# Altium PCB PCB_3U_DAC.PCBDOC
Units mm, origin at the board's own origin, x right, y up, seen from the top; angles counter-clockwise.
Board outline 58 x 105 mm, 4 copper layers (TopLayer, MidLayer2, MidLayer8, BottomLayer), stack 1.662 mm thick; 29 components, 0 nets, 158 pads, 0 vias.
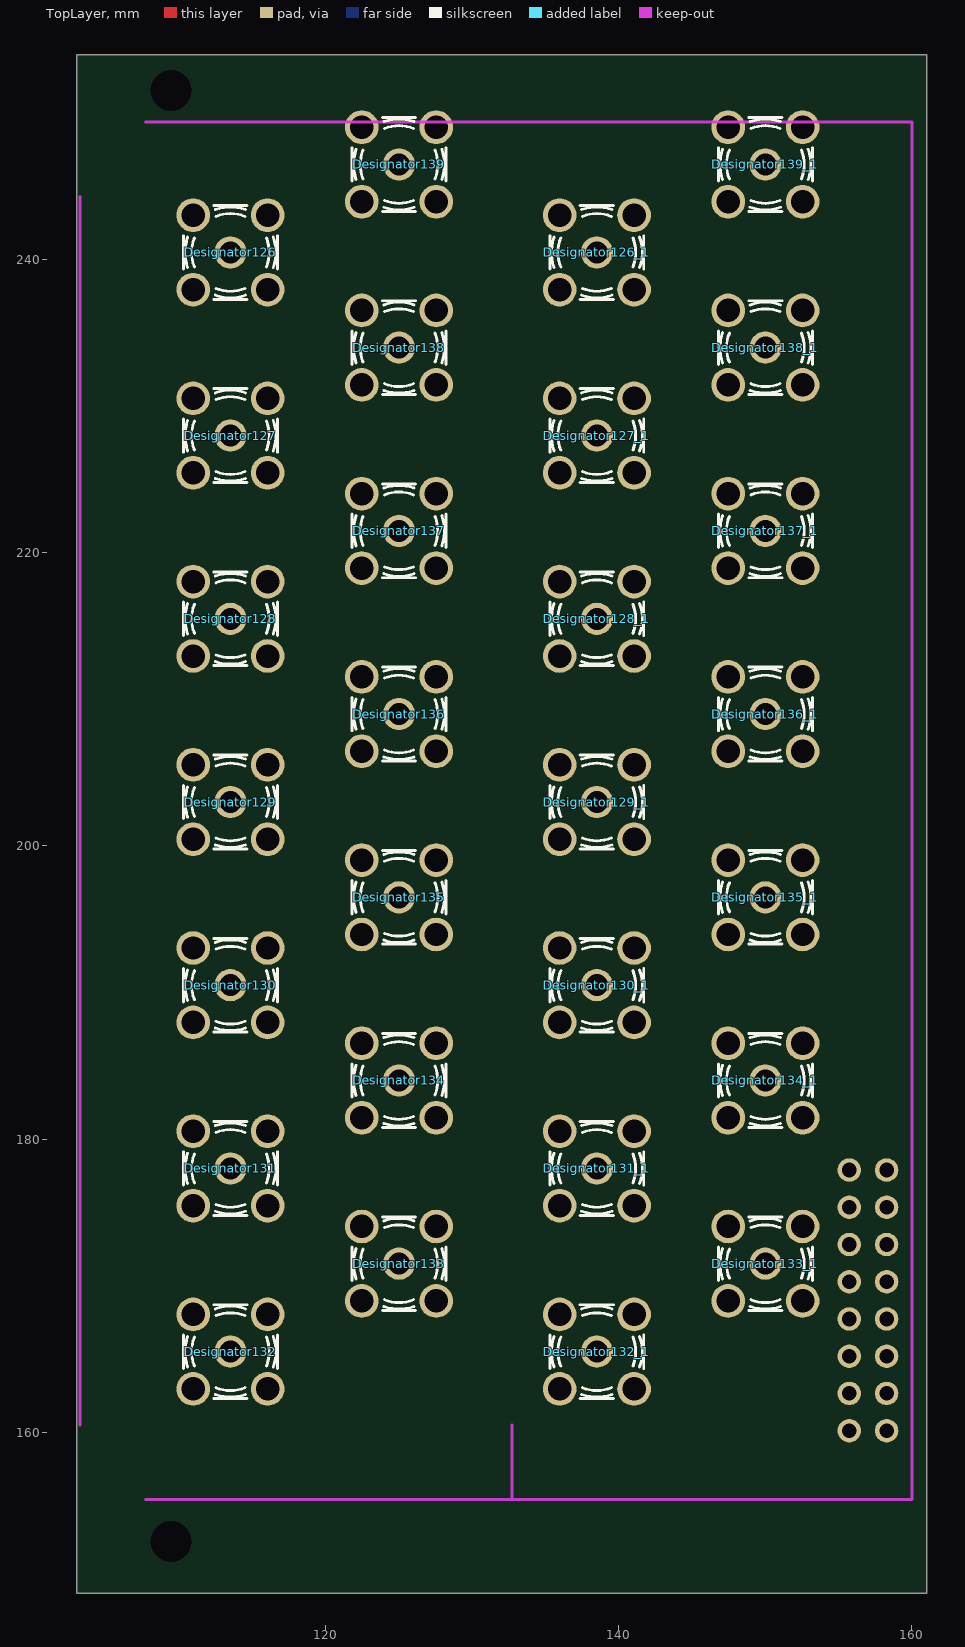
[diagram p0: TopLayer view]
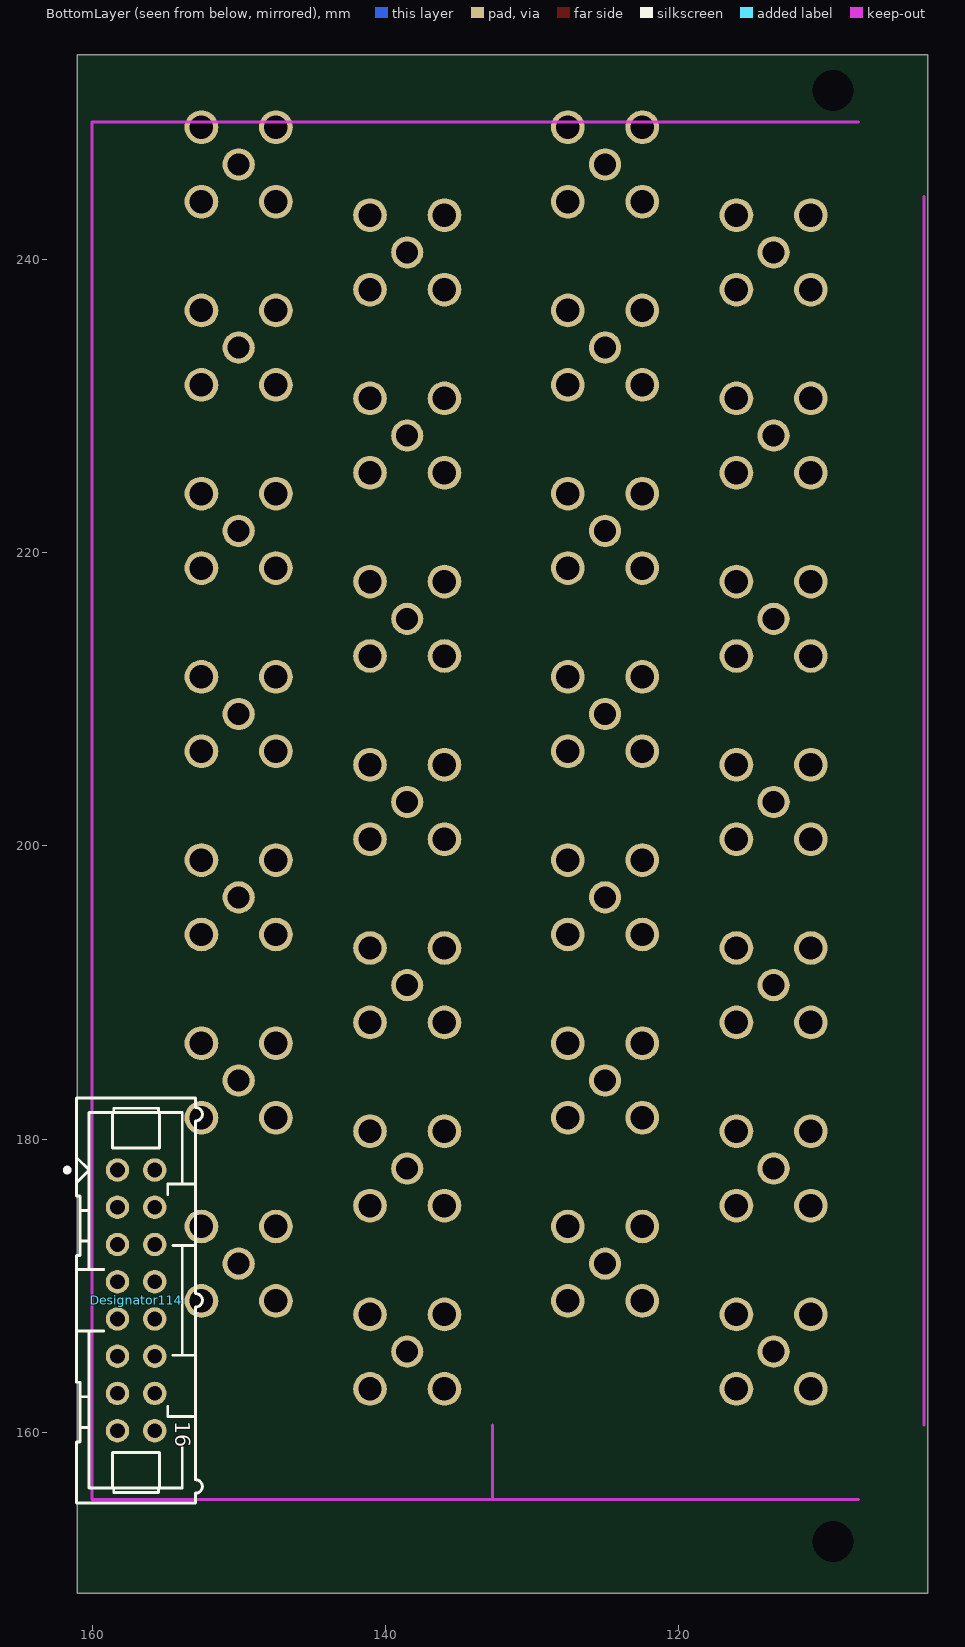
[diagram p1: BottomLayer view, seen from below]

## Layer stack, top to bottom
TopLayer: signal copper 0.0356
Dielectric: core 0.6, FR-4, Dk 4.8
MidLayer2: signal copper 0.0356
Dielectric: prepreg 0.6, FR-4, Dk 4.8
MidLayer8: signal copper 0.0356
Dielectric: core 0.32, FR-4, Dk 4.8
BottomLayer: signal copper 0.0356

## Board outline
103,149 161,149 161,254 103,254

## Design rules (kind name [scope] priority, off if disabled: settings)
Clearance [All] p1: gap=0.254
FabricationTestPointUsage TestPointUsage [All] p1: valid=0 allowmultiple=FALSE
FabricationTestpoint Testpoint [All] p1: side=3 testpointundercomponent=TRUE minsize=1.016 maxsize=2.54 preferedsize=1.524 minholesize=0.508 maxholesize=1.016 preferedholesize=0.813 testpointgrid=0.025 allowsidetop=TRUE allowsidebottom=TRUE usegrid=TRUE gridtolerance=0
PlaneClearance [All] p1: clearance=0.254
PolygonConnect [All] p1: connectstyle=Relief reliefconductorwidth=0.254 reliefentries=4 polygonreliefangle="90 Angle" airgapwidth=0.254
RoutingVias [All] p1: holewidth=0.711 width=1.27 viastyle="Through Hole" minholewidth=0.711 minwidth=1.27 maxholewidth=0.711 maxwidth=1.27
SilkscreenOverComponentPads [IsPad] p1: minsilkscreentomaskgap=0.254
SolderMaskExpansion [All] p1: expansion=0.051
Width [All] p1: maxlimit=0.254 minlimit=0.254 preferedwidth=0.254
24 further rules are at their usual default settings.

## Components (designator, comment, footprint, x,y, rotation, side; value= is the part's Value field where it differs from the comment)
Designator114 "Comment" 3M_N2516-6002RB 157,169 r270 bottom
Designator126 "Comment" HUBER-SUHNER_82_SMA-50-0-41/133_NE 113.5,240.5 r0 top
Designator126_1 "Comment" HUBER-SUHNER_82_SMA-50-0-41/133_NE 138.5,240.5 r0 top
Designator127 "Comment" HUBER-SUHNER_82_SMA-50-0-41/133_NE 113.5,228 r0 top
Designator127_1 "Comment" HUBER-SUHNER_82_SMA-50-0-41/133_NE 138.5,228 r0 top
Designator128 "Comment" HUBER-SUHNER_82_SMA-50-0-41/133_NE 113.5,215.5 r0 top
Designator128_1 "Comment" HUBER-SUHNER_82_SMA-50-0-41/133_NE 138.5,215.5 r0 top
Designator129 "Comment" HUBER-SUHNER_82_SMA-50-0-41/133_NE 113.5,203 r0 top
Designator129_1 "Comment" HUBER-SUHNER_82_SMA-50-0-41/133_NE 138.5,203 r0 top
Designator130 "Comment" HUBER-SUHNER_82_SMA-50-0-41/133_NE 113.5,190.5 r0 top
Designator130_1 "Comment" HUBER-SUHNER_82_SMA-50-0-41/133_NE 138.5,190.5 r0 top
Designator131 "Comment" HUBER-SUHNER_82_SMA-50-0-41/133_NE 113.5,178 r0 top
Designator131_1 "Comment" HUBER-SUHNER_82_SMA-50-0-41/133_NE 138.5,178 r0 top
Designator132 "Comment" HUBER-SUHNER_82_SMA-50-0-41/133_NE 113.5,165.5 r0 top
Designator132_1 "Comment" HUBER-SUHNER_82_SMA-50-0-41/133_NE 138.5,165.5 r0 top
Designator133 "Comment" HUBER-SUHNER_82_SMA-50-0-41/133_NE 125,171.5 r0 top
Designator133_1 "Comment" HUBER-SUHNER_82_SMA-50-0-41/133_NE 150,171.5 r0 top
Designator134 "Comment" HUBER-SUHNER_82_SMA-50-0-41/133_NE 125,184 r0 top
Designator134_1 "Comment" HUBER-SUHNER_82_SMA-50-0-41/133_NE 150,184 r0 top
Designator135 "Comment" HUBER-SUHNER_82_SMA-50-0-41/133_NE 125,196.5 r0 top
Designator135_1 "Comment" HUBER-SUHNER_82_SMA-50-0-41/133_NE 150,196.5 r0 top
Designator136 "Comment" HUBER-SUHNER_82_SMA-50-0-41/133_NE 125,209 r0 top
Designator136_1 "Comment" HUBER-SUHNER_82_SMA-50-0-41/133_NE 150,209 r0 top
Designator137 "Comment" HUBER-SUHNER_82_SMA-50-0-41/133_NE 125,221.5 r0 top
Designator137_1 "Comment" HUBER-SUHNER_82_SMA-50-0-41/133_NE 150,221.5 r0 top
Designator138 "Comment" HUBER-SUHNER_82_SMA-50-0-41/133_NE 125,234 r0 top
Designator138_1 "Comment" HUBER-SUHNER_82_SMA-50-0-41/133_NE 150,234 r0 top
Designator139 "Comment" HUBER-SUHNER_82_SMA-50-0-41/133_NE 125,246.5 r0 top
Designator139_1 "Comment" HUBER-SUHNER_82_SMA-50-0-41/133_NE 150,246.5 r0 top

## Footprints (in the part's own frame and the unit in brackets; to place one, negate y for a bottom-side part, rotate by r counter-clockwise, add the part's x,y. Pads: shape width x height; smd on the part's side, far side on the other; paste and mask are expansions set on the pad)
3M_N2516-6002RB [mm] "16 Contacts - Straight .100\" x .100\" Low Profile Four-Wall Header"
  round 1.6 hole 1: 1(-8.89,-1.27) 2(-8.89,1.27) 3(-6.35,-1.27) 4(-6.35,1.27) 5(-3.81,-1.27) 6(-3.81,1.27) 7(-1.27,-1.27) 8(-1.27,1.27) 9(1.27,-1.27) 10(1.27,1.27) 11(3.81,-1.27) 12(3.81,1.27) 13(6.35,-1.27) 14(6.35,1.27) 15(8.89,-1.27) 16(8.89,1.27)
  silkscreen extent -13.82,-4.85 13.82,4.52, body extent -13.82,-4.17 13.82,4.52, height 9.65
HUBER-SUHNER_82_SMA-50-0-41/133_NE [mm] "50 Ohm SMA Straight PCB Jack"
  round 2.2 hole 1.5: 1(0,0)
  round 2.3 hole 1.6: 2(-2.54,-2.54) 2(-2.54,2.54) 2(2.54,-2.54) 2(2.54,2.54)
  silkscreen extent -3.2,-3.2 3.2,3.2, body extent -3.2,-3.2 3.2,3.2, height 9.5

## Part data
Designator114 Designator126 Designator126_1 Designator127 Designator127_1 Designator128 Designator128_1 Designator129 Designator129_1 Designator130 Designator130_1 Designator131 Designator131_1 Designator132 Designator132_1 Designator133 Designator133_1 Designator134 Designator134_1 Designator135 Designator135_1 Designator136 Designator136_1 Designator137 Designator137_1 Designator138 Designator138_1 Designator139 Designator139_1: library part "HARTING_16 25 170 1301 000"

## Free pads (board coordinates)
  round 1.27 hole 2.794: 1(109.458,251.557) 2(109.458,152.557)

## Nets (pads, with @x,y where several pads share a name; then routed paths per layer and width w, separated by ;. In a path a pad name is that pad's centre, name@x,y a point inside that pad or via, vN(x,y) a via of type N, cw(c..) or ccw(c..) an arc to the next point about the centre after c; other vN are vias at no path point)
pads on no net: Designator114.1 Designator114.2 Designator114.3 Designator114.4 Designator114.5 Designator114.6 Designator114.7 Designator114.8 Designator114.9 Designator114.10 Designator114.11 Designator114.12 Designator114.13 Designator114.14 Designator114.15 Designator114.16 Designator126.1 Designator126.2 Designator126_1.1 Designator126_1.2 Designator127.1 Designator127.2 Designator127_1.1 Designator127_1.2 Designator128.1 Designator128.2 Designator128_1.1 Designator128_1.2 Designator129.1 Designator129.2 Designator129_1.1 Designator129_1.2 Designator130.1 Designator130.2 Designator130_1.1 Designator130_1.2 Designator131.1 Designator131.2 Designator131_1.1 Designator131_1.2 Designator132.1 Designator132.2 Designator132_1.1 Designator132_1.2 Designator133.1 Designator133.2 Designator133_1.1 Designator133_1.2 Designator134.1 Designator134.2 Designator134_1.1 Designator134_1.2 Designator135.1 Designator135.2 Designator135_1.1 Designator135_1.2 Designator136.1 Designator136.2 Designator136_1.1 Designator136_1.2 Designator137.1 Designator137.2 Designator137_1.1 Designator137_1.2 Designator138.1 Designator138.2 Designator138_1.1 Designator138_1.2 Designator139.1 Designator139.2 Designator139_1.1 Designator139_1.2

## Keep-outs
KeepOutLayer:
  lines w0.203: 103.251,160.503 103.251,244.323 ; 107.696,155.423 160,155.423 160,249.403 107.696,249.403 ; 132.696,155.423 132.696,160.503

## Silkscreen, mask and mechanical layers (free items; w line width, h text height)
Mechanical1:
  the board outline again, w0.508

## Dimensions
101.092,157.912 to 103,149 on Mechanical4
105.156,151.892 to 103,149 on Mechanical4

## Text inside footprints (layer, text, board x,y; h text height)
Designator114: BottomOverlay "16" at 154.333,160.745 h1.02 r90; Mechanical14 "16" at 154.333,160.745 h1.02 r90